# Altium PCB PCB1.PcbDoc
Units mm, origin at the board's own origin, x right, y up, seen from the top; angles counter-clockwise.
Board outline 152.4 x 101.6 mm, 2 copper layers (Top Layer, Bottom Layer); 14 components, 20 nets, 82 pads, 24 vias.
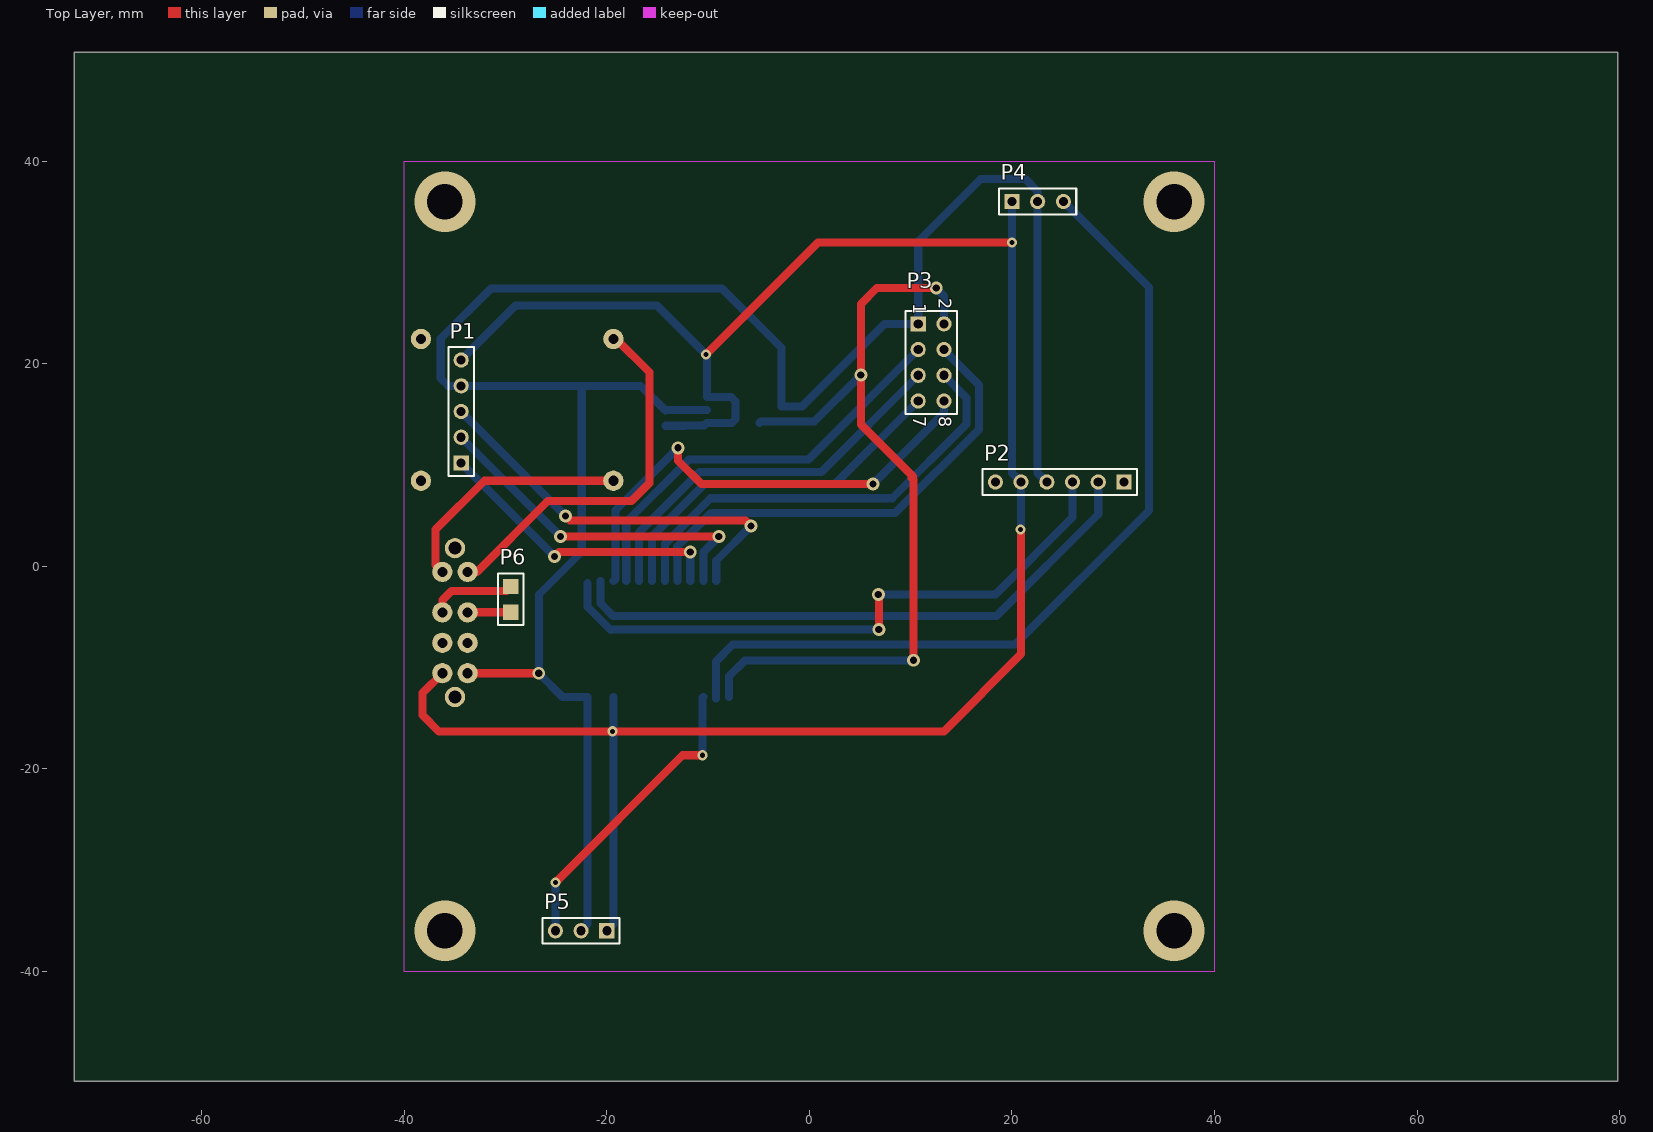
[diagram p0: Top Layer view]
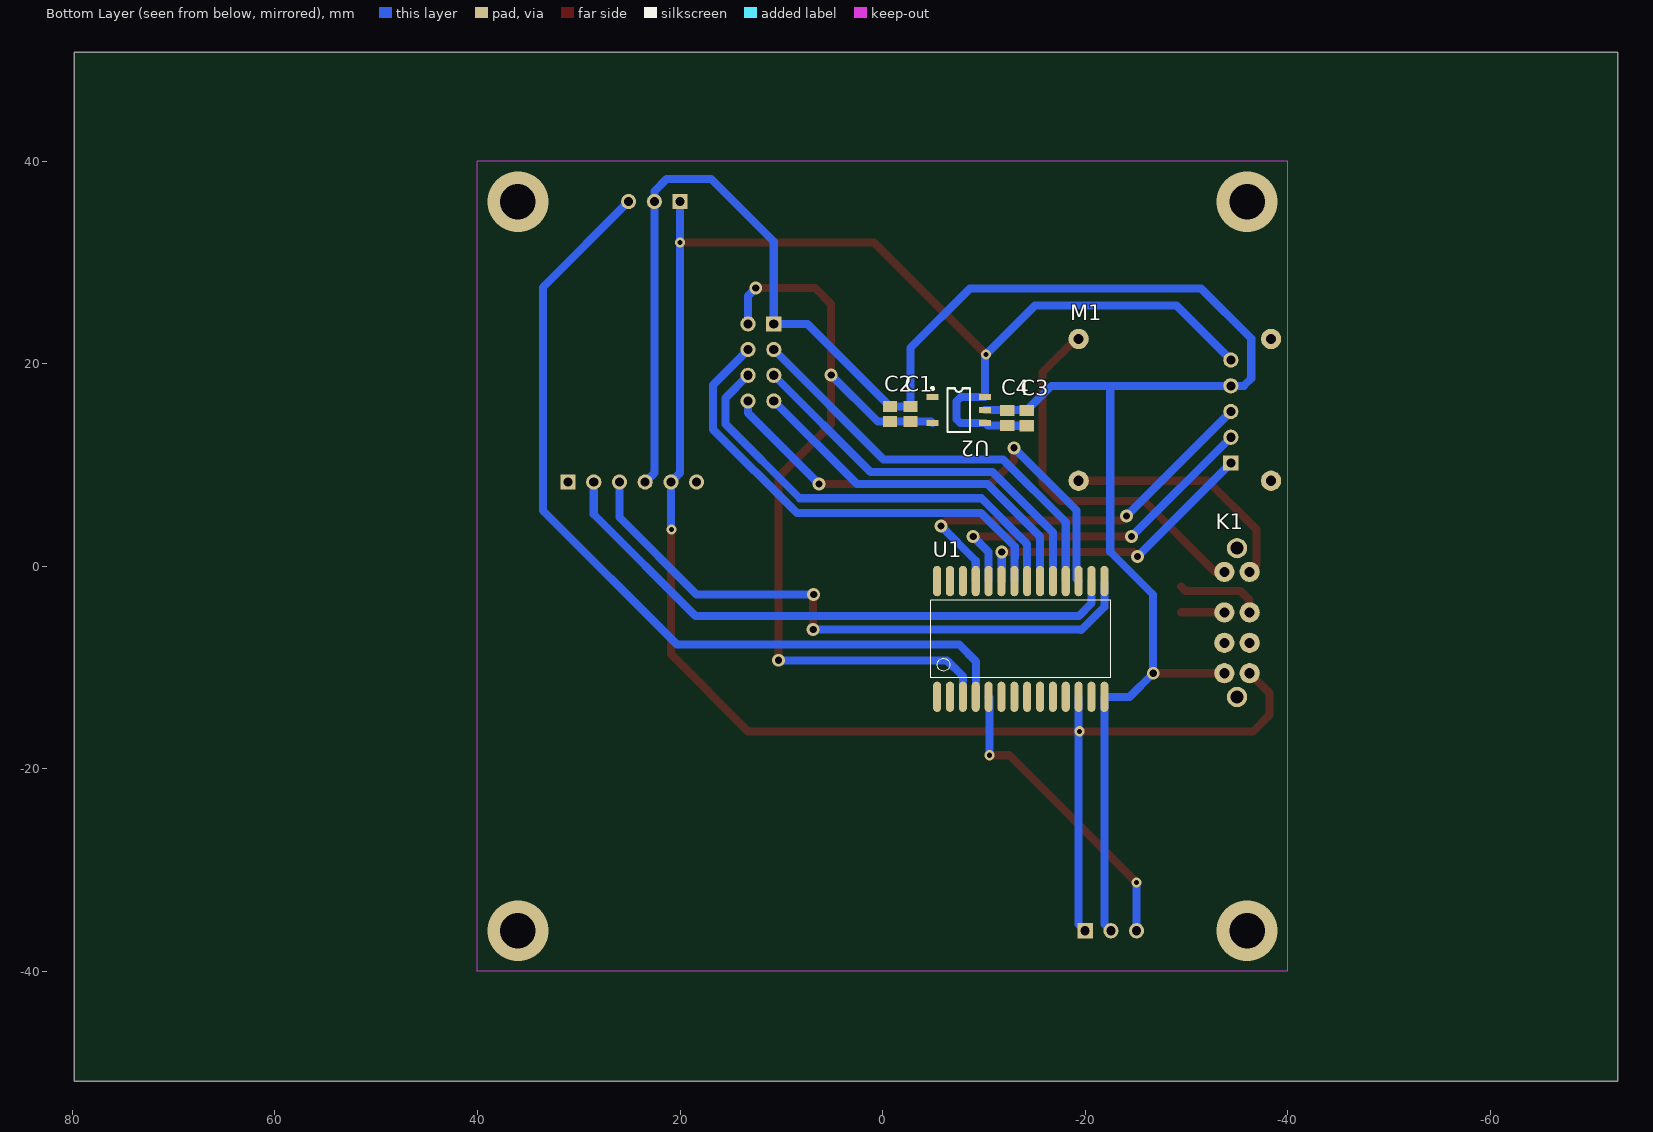
[diagram p1: Bottom Layer view, seen from below]

## Layer stack, top to bottom
Top Solder: solder mask 0.0102, Solder Resist, Dk 3.5
Top Layer: signal copper 0.0356
Dielectric 1: dielectric 0.32, FR-4, Dk 4.8
Bottom Layer: signal copper 0.0356
Bottom Solder: solder mask 0.0102, Solder Resist, Dk 3.5

## Board outline
-72.585,-50.859 79.815,-50.859 79.815,50.741 -72.585,50.741

## Design rules (kind name [scope] priority, off if disabled: settings)
Clearance [All] p1: gap=0.254
PolygonConnect [All] p1: connectstyle=Relief reliefconductorwidth=0.254 reliefentries=4 polygonreliefangle="90 Angle" airgapwidth=0.254
RoutingVias [All] p1: holewidth=0.711 width=1.27 viastyle="Through Hole" minholewidth=0.711 minwidth=1.27 maxholewidth=0.711 maxwidth=1.27
SolderMaskExpansion [All] p1: expansion=0.102
Width [All] p1: maxlimit=0.8 minlimit=0.8 preferedwidth=0.8
30 further rules are at their usual default settings.

## Components (designator, comment, footprint, x,y, rotation, side; value= is the part's Value field where it differs from the comment)
C1 "Cap" C0805 -2.769,15.023 r270 bottom
C2 "Cap" C0805 -0.737,15.023 r270 bottom
C3 "Cap" C0805 -14.224,14.618 r270 bottom
C4 "Cap" C0805 -12.302,14.636 r270 bottom
K1 "KEY 8P" "key 8p" -36.246,-0.569 r0 bottom
M1 "ChongDianModule" ChongDianModule -38.355,22.433 r270 bottom
P1 "16*16" HDR1X5 -34.384,10.189 r90 top
P2 "HC05" HDR1X6 31.064,8.306 r180 top
P3 "24L01" HDR2X4 10.744,23.927 r270 top
P4 "HuoEr" HDR1X3 20,36 r0 top
P5 "HuoEr" HDR1X3 -20,-36 r180 top
P6 "BET" HDR1X2 -29.489,-2.007 r270 top
U1 "STC15W408" SOP28 -5.385,-12.903 r90 bottom
U2 "SPX3819" SOP5(6) -7.518,15.418 r270 bottom

## Footprints (in the part's own frame and the unit in brackets; to place one, negate y for a bottom-side part, rotate by r counter-clockwise, add the part's x,y. Pads: shape width x height; smd on the part's side, far side on the other; paste and mask are expansions set on the pad)
C0805 [mm] "Chip Capacitor, Body 2.0x1.3mm, IPC High Density"
  rect 1.1x1.4 smd: 1(-0.75,0) 2(0.75,0)
  body extent -1.1,-0.72 1.1,0.72, height 1.4
ChongDianModule [mm]
  round 2 hole 1: 1(0,0) 2(14,0) 3(0,-19) 4(14,-19)
HDR1X2 [mm] "Connector; Header; 2 Position"
  rect 1.5x1.5 smd: 1(0,0) 2(2.54,0)
  silkscreen extent -1.27,-1.27 3.81,1.27
HDR1X3 [mm] "Connector; Header; 3 Position"
  rect 1.5x1.5 hole 0.9: 1(0,0)
  round 1.5 hole 0.9: 2(2.54,0) 3(5.08,0)
  silkscreen extent -1.27,-1.27 6.35,1.27
HDR1X5 [mm] "Connector; Header; 5 Position"
  rect 1.5x1.5 hole 0.9: 1(0,0)
  round 1.5 hole 0.9: 2(2.54,0) 3(5.08,0) 4(7.62,0) 5(10.16,0)
  silkscreen extent -1.27,-1.27 11.43,1.27
HDR1X6 [mm] "Connector; Header; 6 Position"
  rect 1.5x1.5 hole 0.9: 1(0,0)
  round 1.5 hole 0.9: 2(2.54,0) 3(5.08,0) 4(7.62,0) 5(10.16,0) 6(12.7,0)
  silkscreen extent -1.27,-1.27 13.97,1.27
HDR2X4 [mm] "Connector; Header; 4x2 Position"
  rect 1.5x1.5 hole 0.9: 1(0,0)
  round 1.5 hole 0.9: 2(0,2.54) 3(2.54,0) 4(2.54,2.54) 5(5.08,0) 6(5.08,2.54) 7(7.62,0) 8(7.62,2.54)
  silkscreen extent -1.27,-1.27 8.89,3.81
"key 8p" [mm]
  round 2 hole 1: 1(0,10) 2(0,7) 3(0,4) 4(0,0) 5(2.5,0) 6(2.5,4) 7(2.5,7) 8(2.5,10)
  round 2 hole 1.3: 9(1.25,-2.35) 9(1.25,12.35)
SOP5(6) [mm] "Small Outline; 6 Leads (1 Absent); Body Width 4.4 mm; Pitch 1.27 mm"
  rect 0.6x1.2 smd: 1(-1.27,-2.6) 3(1.27,-2.6) 4(1.27,2.6) 5(0,2.6) 6(-1.27,2.6)
  silkscreen extent -2.24,-2.72 2.15,1.1
SOP28 [mm]
  oval 3x0.8 smd: 1(0,0) 2(0,-1.27) 3(0,-2.54) 4(0,-3.81) 5(0,-5.08) 6(0,-6.35) 7(0,-7.62) 8(0,-8.89) 9(0,-10.16) 10(0,-11.43) 11(0,-12.7) 12(0,-13.97) 13(0,-15.24) 14(0,-16.51) 15(11.43,-16.51) 16(11.43,-15.24) 17(11.43,-13.97) 18(11.43,-12.7) 19(11.43,-11.43) 20(11.43,-10.16) 21(11.43,-8.89) 22(11.43,-7.62) 23(11.43,-6.35) 24(11.43,-5.08) 25(11.43,-3.81) 26(11.43,-2.54) 27(11.43,-1.27) 28(11.43,0)
  silkscreen extent 1.9,-17.14 9.53,0.63

## Part data
C1 C2 C3 C4: "Capacitor"
P1: library part "Header 5", "Header, 5-Pin"
P2: library part "Header 6", "Header, 6-Pin"
P3: library part "Header 4X2", "Header, 4-Pin, Dual row"
P4 P5: library part "Header 3", "Header, 3-Pin"
P6: library part "Header 2", "Header, 2-Pin"

## Via types
v1: diameter 1.27, hole 0.711, Top Layer to Bottom Layer, 14 vias
v2: diameter 1, hole 0.5, Top Layer to Bottom Layer, 6 vias
v3: diameter 6, hole 3.5, Top Layer to Bottom Layer, 4 vias

## Nets (pads, with @x,y where several pads share a name; then routed paths per layer and width w, separated by ;. In a path a pad name is that pad's centre, name@x,y a point inside that pad or via, vN(x,y) a via of type N, cw(c..) or ccw(c..) an arc to the next point about the centre after c; other vN are vias at no path point)
3V3: C1.2 C2.2 P3.2 U1.3 U2.3 | length 82.2
  Top Layer w0.8: v1(10.287,-9.296) 10.287,8.534 10.109,8.712 10.236,8.839 5.08,13.995 v1(5.08,18.872) 5.08,25.883 6.655,27.457 v1(12.522,27.457)
  Bottom Layer w0.8: U1.3 -7.925,-10.871 -6.35,-9.296 v1(10.287,-9.296) ; U2.3 -4.793,14.273 C1.2 C2.2 0.481,14.273 v1(5.08,18.872) ; v1(12.522,27.457) 13.284,26.695 P3.2
BET+: K1.3 P6.1 | length 8.5
  Top Layer w0.8: K1.3 -36.246,-3.353 -35.331,-2.438 -29.921,-2.438 P6.1
BET-: K1.6 P6.2 | length 4.3
  Top Layer w0.8: K1.6 -33.723,-4.547 P6.2
CE: P3.3 U1.18 | length 41.7
  Bottom Layer w0.8: U1.18 -18.085,4.343 -11.887,10.541 -0.102,10.541 P3.3
CHARGE+: K1.4 M1.4 | length 24
  Top Layer w0.8: K1.4 -36.906,0.091 -36.906,3.607 -32.08,8.433 M1.4
CHARGE-: K1.5 M1.3 | length 37.4
  Top Layer w0.8: K1.5 -32.827,-0.569 -25.832,6.426 -17.577,6.426 -15.799,8.204 -15.799,19.152 -19.08,22.433 M1.3
CSN: P3.4 U1.22 | length 47.3
  Bottom Layer w0.8: U1.22 -13.005,0.819 -13.049,0.863 -13.049,1.931 -9.729,5.251 -5.232,5.251 -5.213,5.232 8.458,5.232 16.739,13.513 16.739,17.882 13.284,21.336 P3.4
DS: P1.1 U1.23 | length 29.5
  Top Layer w0.8: v1(-25.16,0.965) -24.728,1.397 v1(-11.76,1.397)
  Bottom Layer w0.8: P1.1 v1(-25.16,0.965) ; v1(-11.76,1.397) -11.76,-1.448 U1.23
GND: C1.1 C2.1 C3.1 C4.1 K1.8 P1.4 P2.4 P3.1 P4.2 P5.2 U1.14 U2.5 | length 210.8
  Top Layer w0.8: K1.8 v1(-26.718,-10.569)
  Bottom Layer w0.8: P5.2 -21.895,-35.355 U1.14 -24.384,-12.903 v1(-26.718,-10.569) -26.718,-2.817 -22.479,1.422 -22.479,17.707 -22.581,17.809 ; U2.5 -14.175,15.418 C3.1 -16.664,17.809 -22.581,17.809 ; P2.4 22.54,9.21 P4.2 22.54,37.023 21.336,38.227 16.916,38.227 10.744,32.055 P3.1 7.417,23.927 C2.1 C1.1 -2.769,21.565 -8.636,27.432 -31.445,27.432 -36.398,22.479 -36.398,18.542 -35.665,17.809 P1.4 -22.581,17.809
HR1: P4.3 U1.4 | length 86.6
  Bottom Layer w0.8: U1.4@-9.22,-13.056 -9.22,-9.398 -7.569,-7.747 20.32,-7.747 33.553,5.486 33.553,27.527 P4.3
HR2: P5.3 U1.5 | length 30.3
  Top Layer w0.8: v2(-25.08,-31.227) -12.522,-18.669 v2(-10.541,-18.669)
  Bottom Layer w0.8: P5.3 v2(-25.08,-31.227) ; v2(-10.541,-18.669) -10.541,-12.979 U1.5
MISO: P3.7 U1.20 | length 36.2
  Bottom Layer w0.8: U1.20 -15.545,2.921 -10.363,8.103 2.54,8.103 P3.7
MOSI: P3.6 U1.21 | length 44.1
  Bottom Layer w0.8: U1.21 -14.275,2.196 -9.765,6.706 8.179,6.706 15.519,14.046 15.519,16.612 P3.6
RQ: P3.8 U1.17 | length 48.4
  Top Layer w0.8: v1(-12.979,11.684) -12.979,10.414 -10.668,8.103 v1(6.274,8.103)
  Bottom Layer w0.8: U1.17 -19.139,-1.257 -19.139,5.525 v1(-12.979,11.684) ; v1(6.274,8.103) 13.284,15.113 P3.8
RXD: P2.3 U1.15 | length 61.3
  Top Layer w0.8: v1(6.807,-2.794) 6.858,-2.845 v1(6.858,-6.248)
  Bottom Layer w0.8: U1.15@-21.895,-1.689 -21.895,-4.013 -19.609,-6.299 -19.558,-6.248 v1(6.858,-6.248) ; v1(6.807,-2.794) 18.364,-2.794 25.984,4.826 P2.3
SCK: P3.5 U1.19 | length 38.8
  Bottom Layer w0.8: U1.19 -16.815,3.327 -10.846,9.296 1.194,9.296 P3.5
SH_CP: P1.3 U1.25 | length 40.2
  Top Layer w0.8: v1(-24.068,4.953) -23.636,4.521 -6.325,4.521 v1(-5.766,3.962)
  Bottom Layer w0.8: P1.3 v1(-24.068,4.953) ; U1.25 -9.195,0.533 v1(-5.766,3.962)
ST_CP: P1.2 U1.24 | length 34.5
  Top Layer w0.8: v1(-24.576,2.921) v1(-8.941,2.921)
  Bottom Layer w0.8: P1.2 v1(-24.576,2.921) ; U1.24 -10.465,1.397 v1(-8.941,2.921)
TXD: P2.2 U1.16 | length 59.2
  Bottom Layer w0.8: U1.16 -20.625,-3.658 -19.38,-4.902 18.491,-4.902 28.524,5.131 P2.2
VCC: C3.2 C4.2 K1.1 P1.5 P2.5 P4.1 P5.1 U1.12 U2.4 U2.6 | length 215.7
  Top Layer w0.8: K1.1 -38.202,-12.525 -38.202,-14.707 -36.601,-16.307 v2(-19.456,-16.307) 13.284,-16.307 20.904,-8.687 v2@20.904,3.607 ; v2(-10.211,20.904) 0.838,31.953 v2(20.015,31.953)
  Bottom Layer w0.8: P1.5 -29.002,25.73 -15.037,25.73 v2(-10.211,20.904) -10.118,20.812 U2.6 -7.722,16.688 -7.315,16.281 -7.315,14.503 -7.671,14.148 U2.4 -10.381,13.886 C4.2 -12.319,13.868 C3.2 ; P5.1 -19.355,-35.355 U1.12 ; P4.1 20,9.21 P2.5 20.904,3.683 v2(20.828,3.607)
pads on no net: K1.2 K1.7 K1.9 M1.1 M1.2 P2.1 P2.6 U1.1 U1.2 U1.6 U1.7 U1.8 U1.9 U1.10 U1.11 U1.13 U1.26 U1.27 U1.28 U2.1
copper on no net:
  other v3: -35.992,-36.008 36.008,-36.008 -35.992,35.992 36.008,35.992

## Keep-outs
Keep-Out Layer:
  lines w0.1: -39.992,-40.008 -39.992,39.992 40.008,39.992 40.008,-40.008 -39.992,-40.008

## Text inside footprints (layer, text, board x,y; h text height)
P3: Top Overlay "2" at 12.776,26.467 h1.27 r270; Top Overlay "1" at 10.236,25.959 h1.27 r270; Top Overlay "7" at 10.236,14.783 h1.27 r270; Top Overlay "8" at 12.776,14.783 h1.27 r270